# EAGLE board detector ne602 (EAGLE 9.1.2)
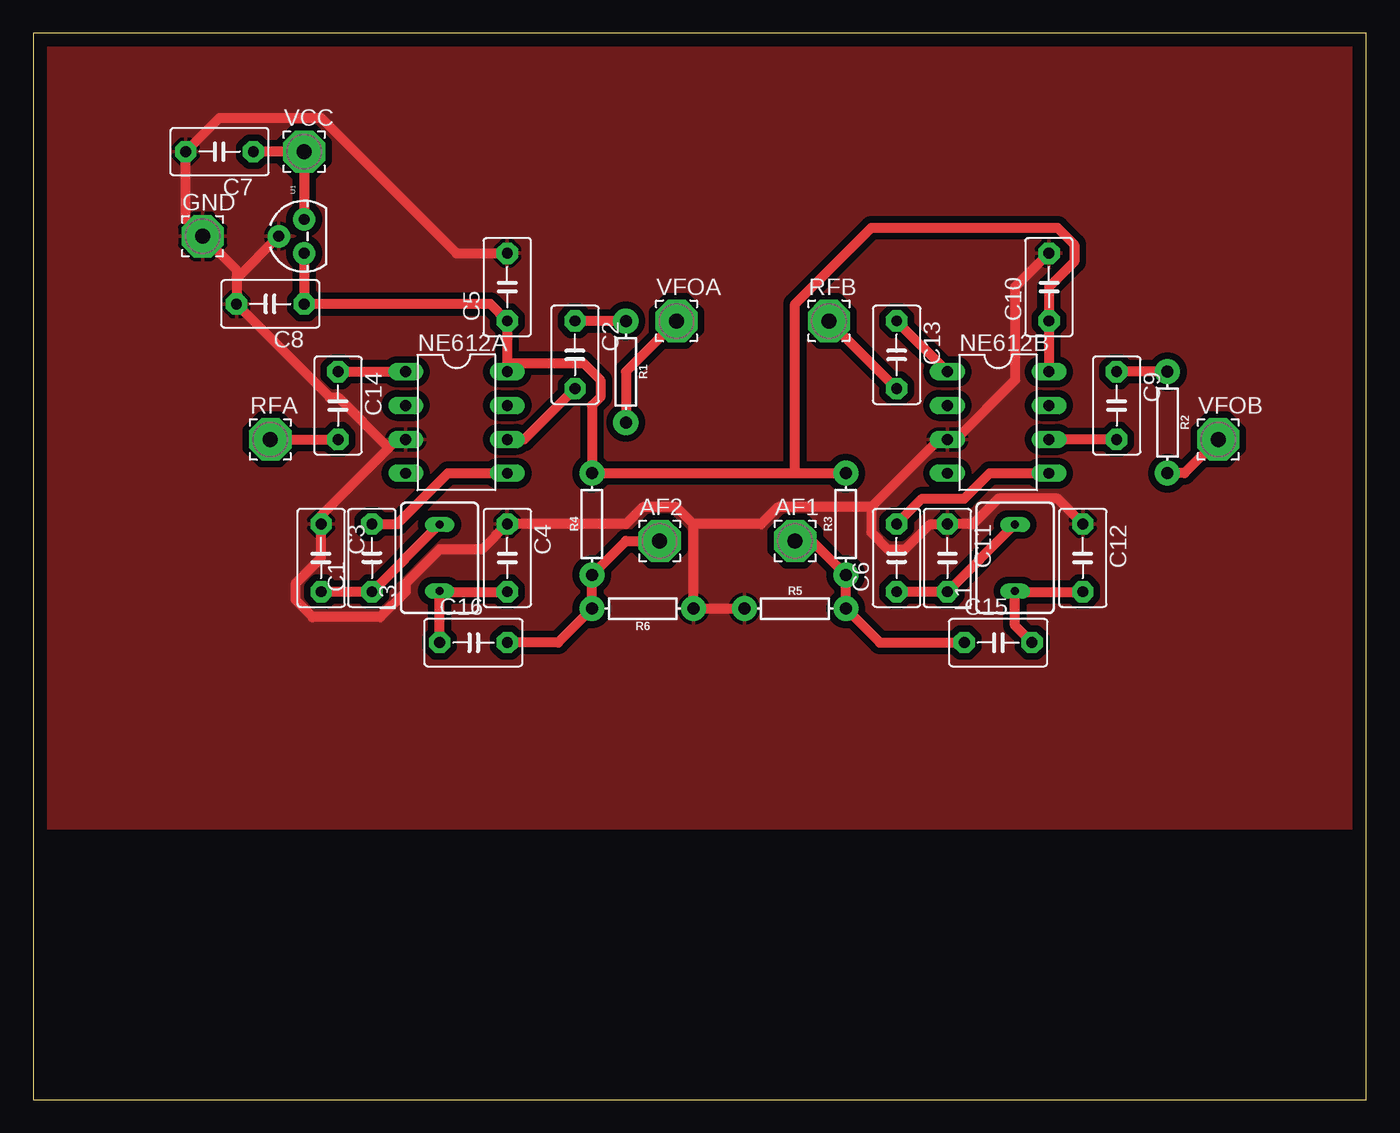
[diagram p0: board, top side]

Size 100 x 80 mm. Coordinates in mm from the lower left corner, seen from the top.
Outline: 0,0 100,0 100,80 0,80 0,0
Copper layers (1*16): Top 0.035mm / dielectric 1.5mm / Bottom 0.035mm
Design rules "default": minimum track width 6mil, minimum drill 0.35mm, track to track 6mil, track to pad 6mil, pad to pad 6mil, via to via 6mil, smd to smd 6mil, copper to edge 40mil, drill to drill 6mil, minimum pad ring 10mil, minimum via ring 8mil, stop-mask expansion 4mil, vias tented up to drill 0mil, thermal gap 10mil
Net classes: 0 default: width 0.762 mm, drill 0.762 mm, clearance 0.508 mm

## Footprints (pad centres in the part's own frame; a part is rotated, then mirrored left to right if it is on the bottom)
3,17/1,1 = drill 1.118 pad 3.175 octagon: 1 0,0
C5B3.5 = drill 0.813 pad 1.6 octagon: 1 -2.54,0; 2 2.54,0
BS75 = drill 0.6 long: 1 -2.5,0; 2 2.5,0
DIL08 = drill 0.813 long: 1 -3.81,-3.81; 2 -1.27,-3.81; 3 1.27,-3.81; 4 3.81,-3.81; 5 3.81,3.81; 6 1.27,3.81; 7 -1.27,3.81; 8 -3.81,3.81
AXIAL-0.3 = drill 0.9 pad 1.88: P$1 -3.81,0; P$2 3.81,0
TO-92 = drill 0.813 pad 1.676: 1 -1.27,0; 2 0,1.905; 3 1.27,0

## Placement (x,y rotation side)
AF1  [3,17/1,1]  57.15,41.91 0 top
AF2  [3,17/1,1]  46.99,41.91 0 top
C1  10uF  [C5B3.5]  25.4,40.64 90 top
C2  100nF  [C5B3.5]  40.64,55.88 270 top
C3  100nF  [C5B3.5]  21.59,40.64 270 top
C4  100nF  [C5B3.5]  35.56,40.64 270 top
C5  .047uF  [C5B3.5]  35.56,60.96 90 top
C6  10uF  [C5B3.5]  64.77,40.64 90 top
C7  100uF  [C5B3.5]  13.97,71.12 180 top
C8  22uf  [C5B3.5]  17.78,59.69 180 top
C9  100nF  [C5B3.5]  81.28,52.07 270 top
C10  .047uF  [C5B3.5]  76.2,60.96 90 top
C11  100nF  [C5B3.5]  68.58,40.64 270 top
C12  100nF  [C5B3.5]  78.74,40.64 270 top
C13  100nF  [C5B3.5]  64.77,55.88 270 top
C14  100nF  [C5B3.5]  22.86,52.07 270 top
C15  100nF  [C5B3.5]  72.39,34.29 0 top
C16  100nF  [C5B3.5]  33.02,34.29 0 top
GND  [3,17/1,1]  12.7,64.77 0 top
L1  1mH  [BS75]  73.66,40.64 90 top
L3  1mH  [BS75]  30.48,40.64 90 top
NE612A  [DIL08]  31.75,50.8 270 top
NE612B  [DIL08]  72.39,50.8 270 top
R1  4.7k  [AXIAL-0.3]  44.45,54.61 270 top
R2  4.7k  [AXIAL-0.3]  85.09,50.8 270 top
R3  7.5  [AXIAL-0.3]  60.96,43.18 90 top
R4  7.5  [AXIAL-0.3]  41.91,43.18 90 top
R5  4.7k  [AXIAL-0.3]  57.15,36.83 0 top
R6  4.7k  [AXIAL-0.3]  45.72,36.83 180 top
RFA  [3,17/1,1]  17.78,49.53 0 top
RFB  [3,17/1,1]  59.69,58.42 0 top
U1  [TO-92]  20.32,64.77 90 top
VCC  [3,17/1,1]  20.32,71.12 0 top
VFOA  [3,17/1,1]  48.26,58.42 0 top
VFOB  [3,17/1,1]  88.9,49.53 0 top

## Library data of the parts
AF1 AF2 GND RFA RFB VCC VFOA VFOB = wirepad
C1-C16 = capacitor-wima
L1 L3 = inductor-neosid; OC_FARNELL: unknown; OC_NEWARK: unknown
NE612A NE612B = ic-package
R1-R6 = SparkFun-Resistors; PROD_ID: RES-12182
U1 = SparkFun-IC-Power

## Nets
8V: C5.1 C8.1 C10.1 NE612A.8 NE612B.8 R3.P$2 R4.P$2 U1.1
GND: C3.1 C4.1 C5.2 C7.2 C8.2 C10.2 C11.1 C12.1 GND.1 NE612A.3 NE612B.3 R5.P$1 R6.P$1 U1.2
N$1: C1.2 NE612A.5
N$2: C2.2 NE612A.6
N$3: C1.1 C3.2 L3.2
N$4: C4.2 C16.1 L3.1
N$5: C2.1 R1.P$1
N$6: R1.P$2 VFOA.1
N$7: C13.1 NE612B.1
N$8: C6.2 NE612B.5
N$9: C9.2 NE612B.6
N$10: C6.1 C11.2 L1.2
N$11: C12.2 C15.2 L1.1
N$12: C9.1 R2.P$1
N$13: R2.P$2 VFOB.1
N$14: C14.1 NE612A.1
N$15: C13.2 RFB.1
N$16: C14.2 RFA.1
N$17: AF1.1 C15.1 R3.P$1 R5.P$2
N$18: AF2.1 C16.2 R4.P$1 R6.P$2
VCC: C7.1 U1.3 VCC.1

## Tracks (layer width: path | path; a pad name or v marks a point on that pad's centre or on a via)
8V
  Top 0.762: U1.1 C8.1 34.29,59.69 C5.1 35.56,55.24 | NE612B.8 C10.1 76.2,60.96 78.11,62.87 78.11,64.14 76.83,65.41 62.87,65.41 57.15,59.69 57.15,46.99 | 35.56,55.24 NE612A.8 35.56,55.24 | 35.56,55.24 41.27,55.24 42.55,53.98 42.55,52.7 41.91,52.07 R4.P$2 57.15,46.99 | 57.15,46.99 R3.P$2
GND
  Top 0.762: NE612A.3 27.3,49.53 26.67,48.9 | 26.67,48.9 21.59,43.81 C3.1 21.59,40.64 19.68,38.73 19.68,37.47 20.95,36.2 26.04,36.2 27.94,38.1 27.94,38.73 30.48,41.27 33.66,41.27 C4.1 44.45,43.18 45.72,44.45 48.26,44.45 49.53,43.18 | 15.24,61.59 15.24,62.23 GND.1 11.43,66.04 C7.2 13.97,73.66 21.59,73.66 31.75,63.5 C5.2 | 15.24,61.59 C8.2 22.23,52.7 22.86,52.7 26.67,48.9 | 15.24,61.59 U1.2 | 49.53,43.18 R6.P$1 R5.P$1 | C12.1 76.83,45.09 72.39,45.09 70.48,43.18 C11.1 67.31,43.18 65.41,41.27 64.14,41.27 62.87,42.55 62.87,44.45 | C10.2 73.66,60.96 73.66,53.98 69.22,49.53 NE612B.3 67.94,49.53 62.87,44.45 | 49.53,43.18 54.61,43.18 55.88,44.45 62.87,44.45
  pour Top: 0,80.01 100.33,80.01 100.33,20.32 0,20.32
N$1
  Top 0.762: NE612A.5 31.11,46.99 27.3,43.18 C1.2
N$2
  Top 0.762: NE612A.6 36.83,49.53 C2.2
N$3
  Top 0.762: L3.2 30.48,43.18 C1.1 C3.2
N$4
  Top 0.762: C16.1 30.48,38.1 | 30.48,38.1 L3.1 30.48,38.1 | 30.48,38.1 C4.2
N$5
  Top 0.762: R1.P$1 C2.1
N$6
  Top 0.762: R1.P$2 44.45,54.61 VFOA.1
N$7
  Top 0.762: C13.1 NE612B.1
N$8
  Top 0.762: NE612B.5 71.75,46.99 69.85,45.09 66.67,45.09 C6.2
N$9
  Top 0.762: C9.2 NE612B.6
N$10
  Top 0.762: L1.2 73.66,43.18 C11.2 C6.1
N$11
  Top 0.762: 73.66,38.1 73.66,35.56 C15.2 | 73.66,38.1 L1.1 73.66,38.1 | 73.66,38.1 C12.2
N$12
  Top 0.762: R2.P$1 C9.1
N$13
  Top 0.762: R2.P$2 86.36,46.99 VFOB.1
N$14
  Top 0.762: C14.1 NE612A.1
N$15
  Top 0.762: RFB.1 C13.2
N$16
  Top 0.762: RFA.1 C14.2
N$17
  Top 0.762: C15.1 63.5,34.29 R5.P$2 R3.P$1 58.42,41.91 AF1.1
N$18
  Top 0.762: C16.2 39.37,34.29 R6.P$2 R4.P$1 44.45,41.91 AF2.1
VCC
  Top 0.762: C7.1 VCC.1 U1.3